# Altium PCB 06002480宁波2号线二期车载PIS系统_功率放大器音频板2 BHC-A-2030-05_PCB V1.0.PcbDoc (part 4 of 6)
Units mil, origin at the board's own origin, x right, y up, seen from the top; angles counter-clockwise.
Board outline 3385.83 x 3779.53 mil, 4 copper layers (Top Layer, GND, VDD, Bottom Layer); 210 components, 185 nets, 792 pads, 313 vias.
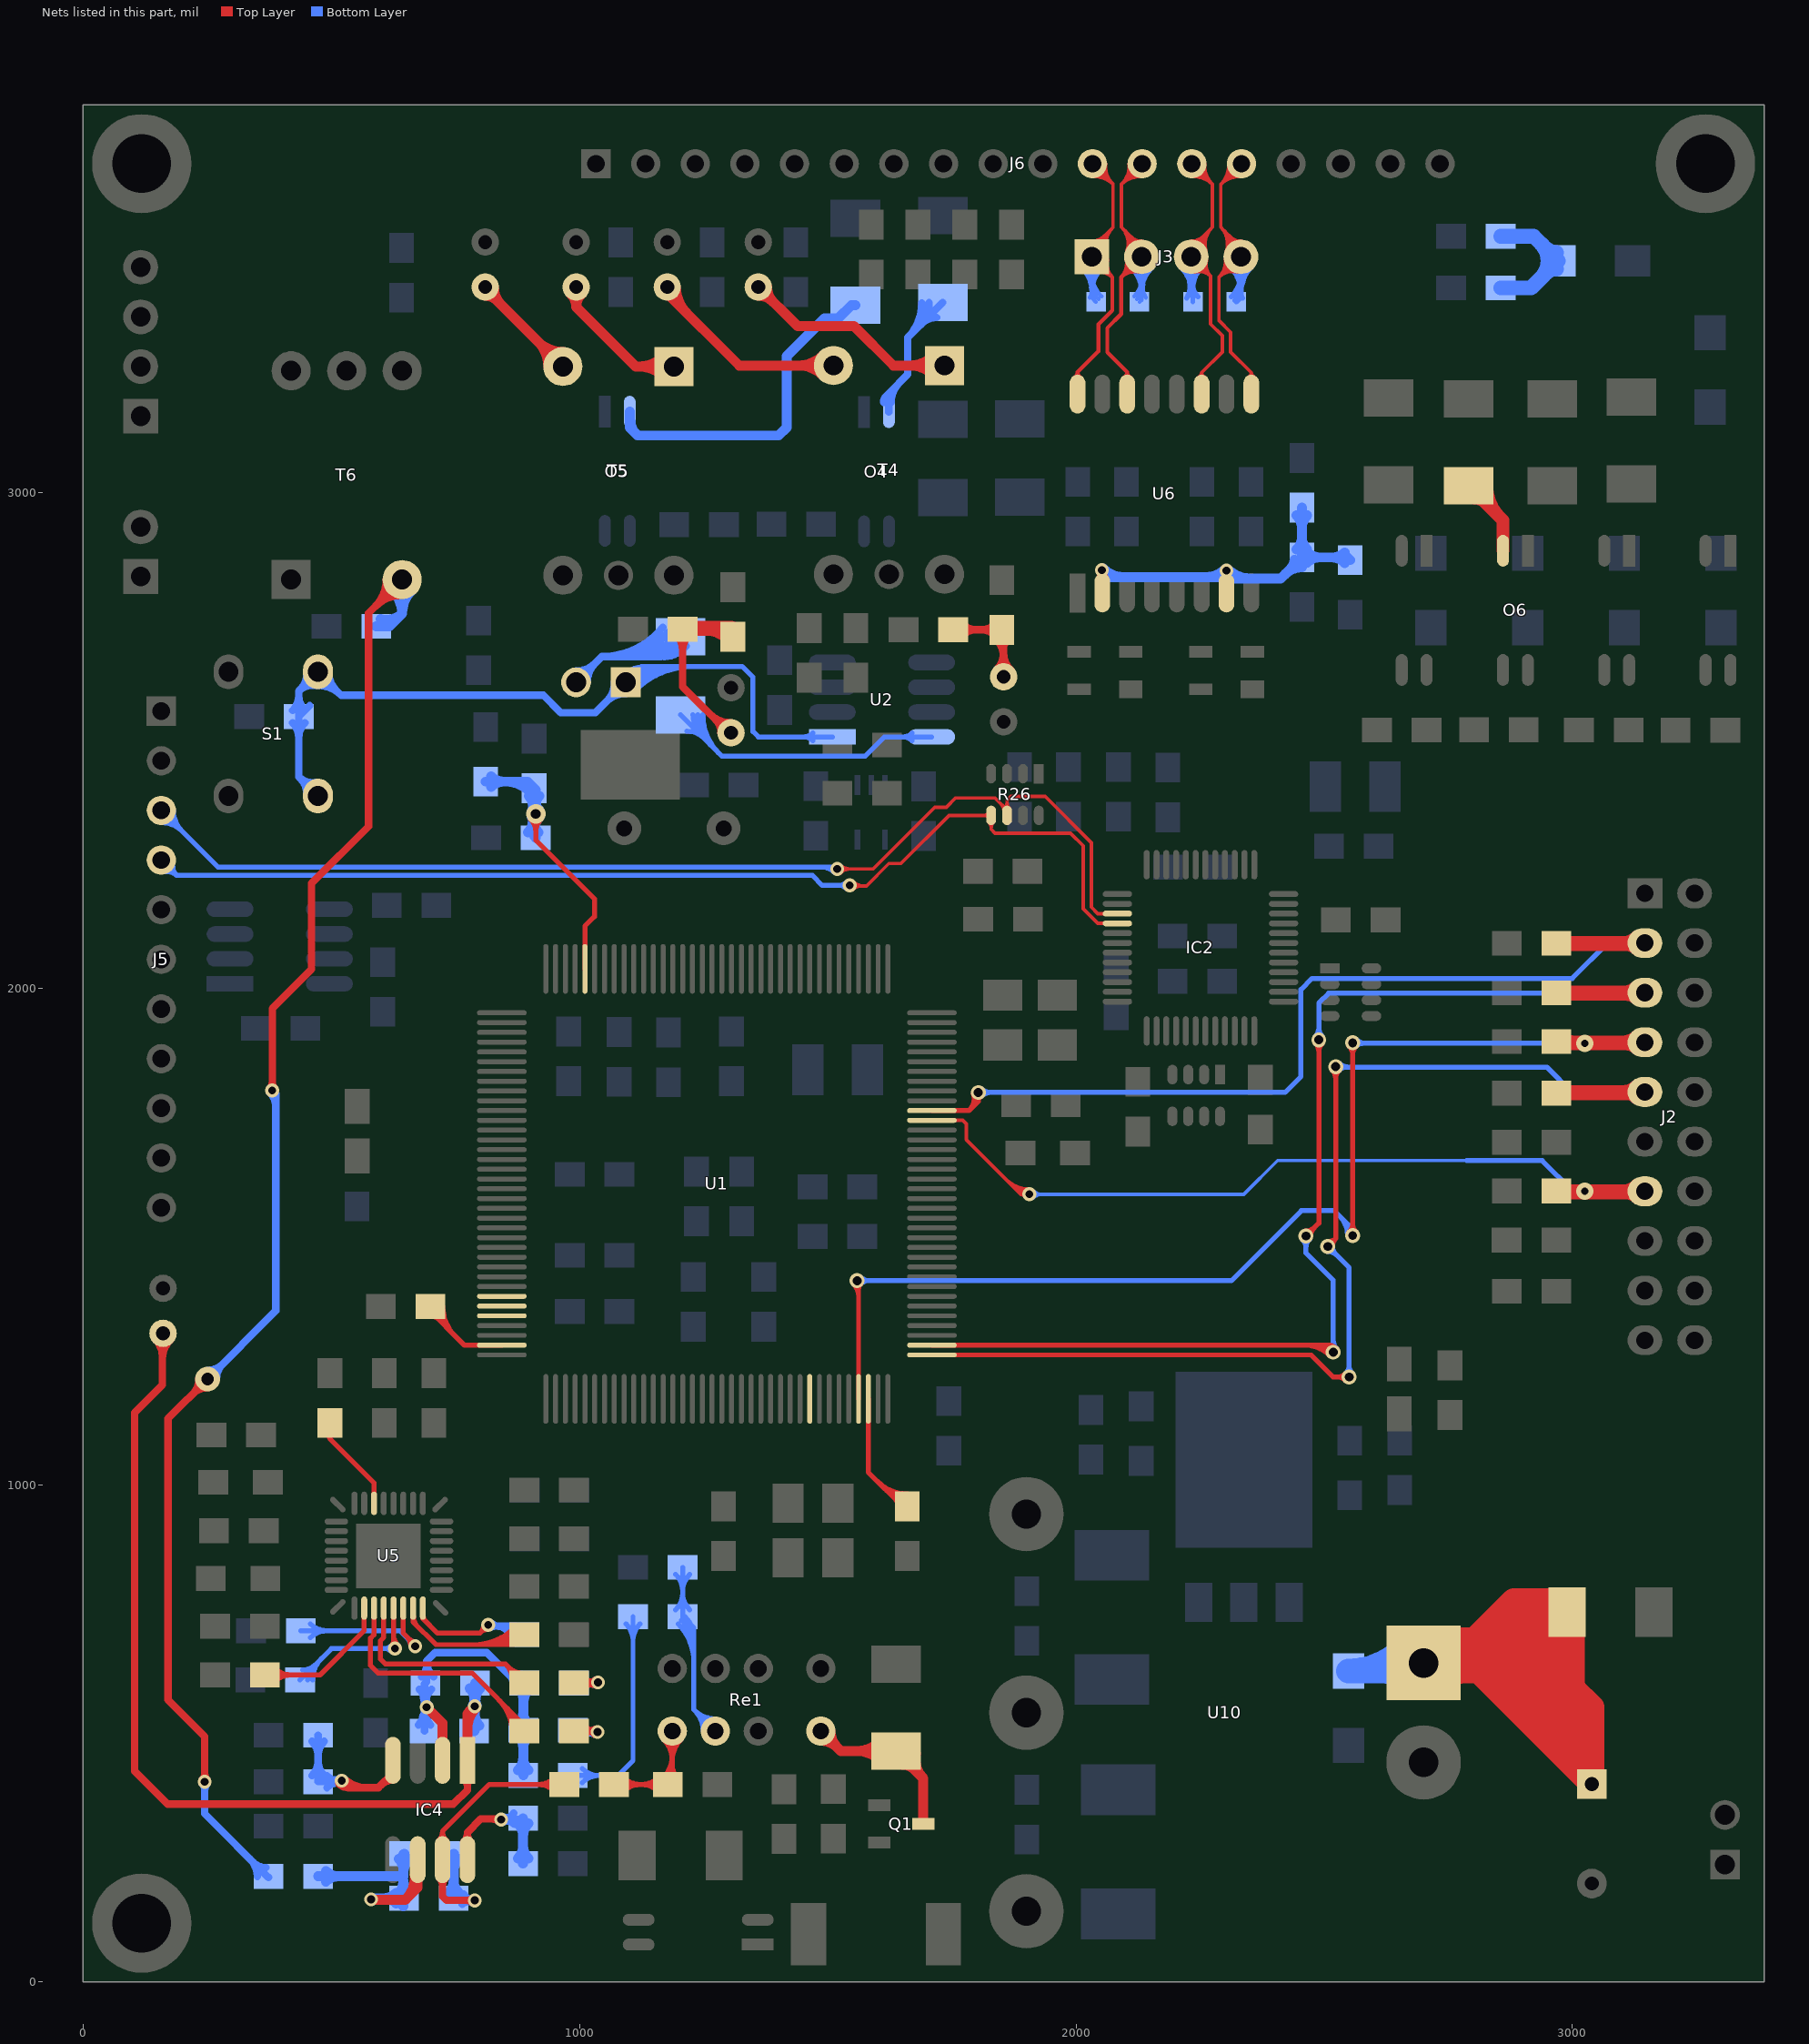
[diagram p6: the nets of this part, all layers, seen from the top]

## Via types
v1: diameter 28, hole 16, Top Layer to Bottom Layer, 240 vias
v2: diameter 30, hole 15, Top Layer to Bottom Layer, 25 vias
v3: diameter 35, hole 15, Top Layer to Bottom Layer, 16 vias
v4: diameter 30, hole 18, Top Layer to Bottom Layer, 10 vias
v5: diameter 40, hole 20, Top Layer to Bottom Layer, 9 vias
v6: diameter 50, hole 25, Top Layer to Bottom Layer, 7 vias
v7: diameter 50, hole 28, Top Layer to Bottom Layer, 5 vias
v8: diameter 36, hole 20, Top Layer to Bottom Layer, 1 vias

## Nets (pads, with @x,y where several pads share a name; then routed paths per layer and width w, separated by ;. In a path a pad name is that pad's centre, name@x,y a point inside that pad or via, vN(x,y) a via of type N, cw(c..) or ccw(c..) an arc to the next point about the centre after c; other vN are vias at no path point) (continued)
JNRST: J2.3 R12.1 U1.134 | length 2219.1
  Top Layer w10: U1.134@1709.58,1754.57 1784.57,1754.57 ; v4@1793.37,1788.29 cw(c1760.19,1778.95) 1784.57,1754.57 ; 1796.64,1766.64 ccw(c1779.03,1784.25) v4(1803,1791) 1803,1773 ; v4@1797.72,1782.51 cw(c1791.8,1773) 1803,1773 ; v4@1808.28,1782.51 ccw(c1814.2,1773) 1803,1773 ; 1784.57,1754.57 1803,1773
  Top Layer w30: R12.1@2967.68,2090.77 J2.3@3144.77,2090.77 ; R12.1@2979.75,2098.44 ccw(c2998.27,2116.96) 2998.27,2090.77 ; 3101.82,2090.77 ccw(c3101.82,2131.18) J2.3@3130.39,2102.61 ; 3107.76,2090.77 cw(c3107.76,2058.76) J2.3@3130.39,2081.39
  Bottom Layer w10: v4(1803,1791) 2421,1791 2453,1823 2453,1998 2475.5,2020.5 2999.5,2020.5 3071,2092 J2.3@3146,2092 ; v4@1810.07,1783.93 cw(c1827.14,1766.86) 1827.14,1791 cw(c1827.14,1815.14) v4@1810.07,1798.07 ; J2.3@3123.32,2074.32 ccw(c3080.64,2031.64) 3080.64,2092 ccw(c3080.64,2152.36) J2.3@3123.32,2109.68 ; J2.3@3130.39,2081.39 ccw(c3104.79,2055.79) 3104.79,2092 ccw(c3104.79,2128.21) J2.3@3130.39,2102.61
JTCK: J2.9 R29.2 U1.109 | length 2765.1
  Top Layer w10: U1.109@1709.58,1262.44 2473.44,1262.44 2517.88,1218 v4(2550,1218) ; v4(2507,1481) 2523,1497 ; v4@2507.47,1490.99 ccw(c2508.43,1511.56) 2523,1497 ; v4@2515.93,1835.93 cw(c2498.86,1818.86) 2523,1818.86 cw(c2547.14,1818.86) v4@2530.07,1835.93 ; v4@2516.99,1481.47 cw(c2537.56,1482.43) 2523,1497 ; v4(2523,1843) 2523,1497 ; v4@2542.93,1210.93 ccw(c2525.86,1193.86) 2525.86,1218 ccw(c2525.86,1242.14) v4@2542.93,1225.07
  Top Layer w30: R29.2@2967.68,1790.77 J2.9@3144.77,1790.77 ; R29.2@2979.75,1782.56 cw(c2999.57,1762.74) 2999.57,1790.77 ; 3101.82,1790.77 ccw(c3101.82,1831.18) J2.9@3130.39,1802.61 ; 3107.76,1790.77 cw(c3107.76,1758.76) J2.9@3130.39,1781.39
  Bottom Layer w10: v4@2507,1471 cw(c2507,1446.86) 2524.07,1463.93 cw(c2541.14,1481) v4@2517,1481 ; v4(2507,1481) 2550,1438 v4(2550,1218) ; v4(2523,1843) 2524,1842 2948.26,1842 3001,1789.26 3143.26,1789.26 J2.9@3146,1792 ; v4@2530.07,1835.93 cw(c2544.73,1821.27) 2544.73,1842 ; v4@2530.07,1850.07 ccw(c2549.56,1869.56) 2549.56,1842 ; v4@2542.93,1225.07 ccw(c2525.86,1242.14) 2550,1242.14 ccw(c2574.14,1242.14) v4@2557.07,1225.07 ; 3074.03,1789.26 ccw(c3074.03,1858.97) J2.9@3123.32,1809.68 ; 3087.26,1789.26 cw(c3087.26,1738.26) J2.9@3123.32,1774.32 ; 3098.17,1789.26 ccw(c3098.17,1834.83) J2.9@3130.39,1802.61
JTDI: J2.5 R13.2 U1.110 | length 2954.5
  Top Layer w10: U1.110@1709.58,1282.13 2503.87,1282.13 ; 2459.75,1282.13 cw(c2459.75,1209.75) v4@2510.93,1260.93 ; v4(2463,1502) 2489,1528 v4(2489,1897) ; v4@2463,1512 ccw(c2463,1536.14) 2480.07,1519.07 ccw(c2497.14,1502) v4@2473,1502 ; v4@2481.93,1889.93 cw(c2464.86,1872.86) 2489,1872.86 cw(c2513.14,1872.86) v4@2496.07,1889.93 ; 2483.9,1282.13 cw(c2483.9,1233.9) v4(2518,1268) 2503.87,1282.13 ; 2508.04,1282.13 cw(c2508.04,1258.04) v4@2525.07,1275.07 ; v4@2508.1,1269.42 ccw(c2493.3,1271.55) 2503.87,1282.13 ; v4@2516.58,1277.9 cw(c2514.45,1292.7) 2503.87,1282.13
  Top Layer w30: R13.2@2967.68,1990.77 J2.5@3144.77,1990.77 ; R13.2@2979.75,1998.7 ccw(c2998.9,2017.85) 2998.9,1990.77 ; 3101.82,1990.77 ccw(c3101.82,2031.18) J2.5@3130.39,2002.61 ; 3107.76,1990.77 cw(c3107.76,1958.76) J2.5@3130.39,1981.39
  Bottom Layer w10: v4@2455.93,1494.93 cw(c2438.86,1477.86) 2463,1477.86 cw(c2487.14,1477.86) v4@2470.07,1494.93 ; v4(2463,1502) 2463,1468 2518,1413 v4(2518,1268) ; v4@2481.93,1904.07 ccw(c2464.86,1921.14) 2489,1921.14 ccw(c2513.14,1921.14) v4@2496.07,1904.07 ; v4(2489,1897) 2489,1971 2509,1991 3145,1991 J2.5@3146,1992 ; v4@2510.93,1275.07 ccw(c2493.86,1292.14) 2518,1292.14 ccw(c2542.14,1292.14) v4@2525.07,1275.07 ; 3078.23,1991 ccw(c3078.23,2054.77) J2.5@3123.32,2009.68 ; 3083.06,1991 cw(c3083.06,1934.06) J2.5@3123.32,1974.32 ; 3102.37,1991 ccw(c3102.37,2030.63) J2.5@3130.39,2002.61 ; 3107.2,1991 cw(c3107.2,1958.2) J2.5@3130.39,1981.39
JTDO: J2.13 R15.1 U1.133 | length 1914.4
  Top Layer w7: U1.133@1709.58,1734.88 1772,1734.88 1779,1727.88 1779,1696 1889,1586 ; 1859.05,1615.95 ccw(c1906,1662.89) v1@1906,1596.5 ; 1871,1604 ccw(c1906,1638.99) v1@1906,1589.5 ; 1882.95,1592.05 ccw(c1906,1615.09) v1@1906,1582.5 ; v1@1896.61,1581.3 ccw(c1889,1577.49) 1889,1586 ; v1@1896.61,1590.7 cw(c1889,1594.51) 1889,1586 ; v1(1906,1586) 1889,1586
  Top Layer w30: R15.1@2967.68,1590.77 J2.13@3144.77,1590.77 ; R15.1@2979.75,1599.44 ccw(c3000.68,1620.37) 3000.68,1590.77 ; 3101.82,1590.77 ccw(c3101.82,1631.18) J2.13@3130.39,1602.61 ; 3107.76,1590.77 cw(c3107.76,1558.76) J2.13@3130.39,1581.39
  Bottom Layer w7: v1(1906,1586) 2338,1586 2406,1654 2787,1654 ; v1@1913.42,1578.58 cw(c1931.35,1560.65) 1931.35,1586 cw(c1931.35,1611.35) v1@1913.42,1593.42
  Bottom Layer w10: 2787,1654 2939,1654 3001,1592 ; v3@3014.76,1584.83 ccw(c3001,1575.21) 3001,1592 ; v3@3014.76,1599.17 cw(c3001,1608.79) 3001,1592 ; v3(3025,1592) 3001,1592
JTMS: J2.7 R14.1 U1.105 | length 2745.7
  Top Layer w10: v4@1551.93,1404.93 cw(c1527.75,1380.75) 1561.94,1380.75 ; v4(1559,1412) 1561.94,1409.06 U1.105@1561.94,1173.86 ; 1561.94,1394.97 cw(c1576.03,1394.97) v4@1566.07,1404.93 ; v4@2549.93,1510.07 ccw(c2532.86,1527.14) 2557,1527.14 ccw(c2581.14,1527.14) v4@2564.07,1510.07 ; v4@2549.93,1883.93 cw(c2532.86,1866.86) 2557,1866.86 cw(c2581.14,1866.86) v4@2564.07,1883.93 ; v4(2557,1503) v4(2557,1891)
  Top Layer w30: R14.1@2967.68,1890.77 J2.7@3144.77,1890.77 ; R14.1@2979.75,1900.44 ccw(c3003.1,1923.79) 3003.1,1890.77 ; 3101.82,1890.77 ccw(c3101.82,1931.18) J2.7@3130.39,1902.61 ; 3107.76,1890.77 cw(c3107.76,1858.76) J2.7@3130.39,1881.39
  Bottom Layer w10: v4(1559,1412) 2313,1412 2454,1553 2520,1553 2557,1516 v4(2557,1503) ccw(c2525.62,1503) 2547.81,1525.19 ; v4@1566.07,1404.93 cw(c1583.14,1387.86) 1583.14,1412 cw(c1583.14,1436.14) v4@1566.07,1419.07 ; 2530.74,1542.26 cw(c2491.47,1503) v4@2547,1503 ; v4(2557,1891) 2558,1890 v3(3025,1890) ; v4@2564.07,1883.93 cw(c2578.73,1869.27) 2578.73,1890 ; v4@2564.07,1898.07 ccw(c2583.56,1917.56) 2583.56,1890 ; v3@3016.16,1881.16 ccw(c2994.82,1859.82) 2994.82,1890 ccw(c2994.82,1920.18) v3@3016.16,1898.84
L3CLK: U1.67
L3DATA: U1.66
L3MODE: U1.68
LEDLINK: IC2.28 J5.4 R26.5 | length 2365.3
  Top Layer w7: v1(1544,2208) 1545,2207 1578,2207 1623,2252 1647,2252 1744,2349 R26.5@1829,2349 1829,2321 1837,2313 1989,2313 2014.2,2287.8 2014.2,2161.2 2043.92,2131.48 IC2.28@2083.36,2131.48 ; v1@1551.42,2200.58 cw(c1566.94,2185.07) 1566.94,2207 ; v1@1551.42,2215.42 ccw(c1571.76,2235.76) 1571.76,2207 ; R26.5@1824.4,2334.72 cw(c1813.31,2323.62) 1829,2323.62 cw(c1844.69,2323.62) R26.5@1833.6,2334.72 ; R26.5@1824.4,2344.4 ccw(c1813.31,2333.31) 1813.31,2349 ccw(c1813.31,2364.69) R26.5@1824.4,2353.6
  Bottom Layer w10: J5.4@157.48,2259.06 188.54,2228 ; J5.4@163.15,2235.19 cw(c169.41,2208.87) 188.53,2228 ; J5.4@181.34,2253.38 ccw(c207.66,2247.13) 188.53,2228 ; v1@1537.64,2201.64 ccw(c1522.27,2186.27) 1522.27,2208 ccw(c1522.27,2229.73) v1@1537.64,2214.36 ; v1(1544,2208) 1489,2208 1469,2228 188.54,2228
LEDSPEED: IC2.27 J5.3 R26.6 | length 2516
  Top Layer w7: v1(1519,2241) 1591,2241 1715.5,2365.5 1738.5,2365.5 1757,2384 1837,2384 R26.6@1861,2360 ; v1@1526.42,2233.58 cw(c1544.35,2215.65) 1544.35,2241 cw(c1544.35,2266.35) v1@1526.42,2248.42 ; 1848.97,2372.03 cw(c1835.63,2358.68) R26.6@1854.5,2358.68 ; 1852.15,2368.85 ccw(c1861,2377.7) R26.6@1861,2365.18 ; R26.6@1856.4,2363.28 ccw(c1845.31,2374.38) 1861,2374.38 ccw(c1876.69,2374.38) R26.6@1865.6,2363.28 ; R26.6@1861,2349 R26.6@1861,2360 ; IC2.27@2083.36,2151.17 2044.04,2151.17 2031.1,2164.1 2031.1,2293.9 1938,2387 1869,2387 1861,2379 R26.6@1861,2360
  Bottom Layer w10: J5.3@157.48,2334.53 cw(c157.48,2275.31) 199.35,2317.18 cw(c241.22,2359.06) J5.3@182.01,2359.06 ; J5.3@157.48,2344.53 cw(c157.48,2309.46) 182.28,2334.26 cw(c207.08,2359.06) J5.3@172.01,2359.06 ; J5.3@157.48,2359.06 271.54,2245 1515,2245 v1(1519,2241) ; 1487.62,2245 cw(c1487.62,2209.62) v1@1512.64,2234.64
LINE_OUT: C55.2 U5.12 | length 506.9
  Top Layer w10: U5.12@605.63,752.63 605.63,693.63 599,687 599,650 609,640 850.79,640 ; 858.07,632.72 ccw(c883.68,658.32) C55.2@883.68,622.11 ; C55.2@863.76,603.99 ccw(c818.99,608.2) 850.79,640 ; C55.2@865.83,624.96 cw(c846.47,605.61) C55.2@873.72,603.05 ; C55.2@888.68,602.11 850.79,640
MB_RX_N: D8.A J3.4 J6.14 U6.9 | length 1773.4
  Top Layer w7: 2296.85,3441.85 cw(c2319.01,3419.69) J3.4@2326.3,3450.17 ; 2298.13,3443.13 ccw(c2274.43,3466.83) J3.4@2307.69,3470.97 ; J3.4@2300.74,3470.11 cw(c2256.42,3464.58) 2288,3433 ; 2305.7,3450.7 cw(c2322.43,3433.97) J3.4@2327.93,3456.98 ; J6.14@2307.08,3660.13 cw(c2253.99,3657.5) 2291.57,3619.91 ; 2307.13,3517.87 cw(c2281.56,3492.3) 2315.55,3479.97 ccw(c2281.56,3492.3) 2307.13,3517.87 ; J6.14@2314.07,3660.47 cw(c2275.26,3658.55) 2302.73,3631.08 cw(c2330.21,3603.6) J6.14@2332.13,3642.41 ; J3.4@2324.68,3443.36 ccw(c2315.6,3405.4) 2288,3433 ; J6.14@2331.78,3635.42 ccw(c2329.16,3582.33) 2291.57,3619.91 ; J3.4@2332,3474 2329,3474 2288,3433 ; J6.14@2333.07,3661.41 2291.57,3619.91 ; U6.9@2347.58,3232.09 ccw(c2343.29,3240.79) 2353,3240.79 ; U6.9@2353,3197.48 2353,3240.8 ; U6.9@2358.42,3232.09 cw(c2362.71,3240.79) 2353,3240.79 ; 2288,3433 2288,3345.54 2311.5,3322.04 2311.5,3282.3 2353,3240.8 ; 2291.57,3533.42 cw(c2258.73,3500.59) 2302.39,3484.74 ccw(c2258.73,3500.59) 2291.57,3533.43 ; 2291.57,3533.43 2291.57,3619.91 ; 2291.57,3533.42 2333,3492 2291.57,3533.43 ; 2299.35,3525.65 cw(c2270.15,3496.44) 2308.97,3482.36 ccw(c2270.15,3496.45) 2299.35,3525.65 ; 2310.65,3514.34 ccw(c2332,3535.69) 2332,3505.5 cw(c2332,3535.68) 2310.66,3514.34 ; 2314.91,3510.09 cw(c2292.98,3488.16) 2322.13,3477.58 ccw(c2292.97,3488.16) 2314.91,3510.09
  Bottom Layer w10: J3.4@2310.79,3452.79 cw(c2259.57,3401.57) 2332,3401.57 cw(c2404.43,3401.57) J3.4@2353.21,3452.79 ; D8.A@2312.62,3393.38 ccw(c2265.82,3440.18) J3.4@2332,3440.18 ; D8.A@2315.09,3395.37 ccw(c2287.16,3439.05) 2337.79,3427.91 ; J3.4@2317.86,3459.86 cw(c2283.72,3425.72) 2332,3425.72 cw(c2380.28,3425.72) J3.4@2346.14,3459.86 ; D8.A@2319.69,3386.31 ccw(c2289.96,3416.04) 2332,3416.04 ; D8.A@2320.48,3386.95 ccw(c2305.55,3410.28) 2332.61,3404.34 ; D8.A@2323,3383 2332,3392 J3.4@2332,3474 ; 2332.81,3405.27 ccw(c2351.43,3401.18) D8.A@2335.37,3390.91
MB_RX_P: D8.K J3.3 J6.13 U6.11 | length 1681.4
  Top Layer w7: J3.3@2232,3474 2271,3435 ; J6.13@2233.07,3661.41 2274.57,3619.91 2274.57,3533.57 2233,3492 2274.57,3533.57 ; J6.13@2234.01,3642.41 cw(c2235.93,3603.6) 2263.41,3631.08 cw(c2290.88,3658.55) J6.13@2252.08,3660.47 ; J6.13@2234.36,3635.42 cw(c2236.99,3582.33) 2274.57,3619.91 cw(c2312.15,3657.5) J6.13@2259.07,3660.13 ; J3.3@2238.12,3450.28 cw(c2244.44,3425.78) 2262.33,3443.67 cw(c2280.22,3461.56) J3.3@2255.72,3467.88 ; J3.3@2239.87,3443.5 cw(c2247.99,3412) 2271,3435 ; U6.11@2247.58,3232.09 ccw(c2243.29,3240.79) 2253,3240.79 ; U6.11@2253,3197.48 2253,3240.8 ; U6.11@2258.42,3232.09 cw(c2262.71,3240.79) 2253,3240.79 ; J3.3@2262.5,3466.13 ccw(c2294,3458.01) 2271,3435 ; 2253,3240.8 2294.5,3282.3 2294.5,3315 2271,3338.5 2271,3435 ; J3.3@2232,3505.5 ccw(c2232,3540.52) 2256.76,3515.76 cw(c2232,3540.51) J3.3@2232,3505.5 ; J3.3@2242.03,3477.1 cw(c2272.39,3486.46) 2249.93,3508.92 ccw(c2272.39,3486.46) J3.3@2242.03,3477.1 ; J3.3@2248.72,3479.16 cw(c2284.94,3490.33) 2258.14,3517.14 ccw(c2284.95,3490.34) J3.3@2248.72,3479.16 ; J3.3@2255.41,3481.22 cw(c2297.5,3494.21) 2266.35,3525.35 ccw(c2297.5,3494.21) J3.3@2255.41,3481.22 ; J3.3@2262.1,3483.29 cw(c2310.06,3498.08) 2274.57,3533.56 ccw(c2310.06,3498.08) J3.3@2262.1,3483.29
  Bottom Layer w10: J3.3@2210.79,3452.79 cw(c2151.84,3393.84) D8.K@2235.2,3393.84 ; J3.3@2217.86,3459.86 cw(c2175.98,3417.98) 2235.2,3417.98 ; D8.K@2222.69,3390.68 ccw(c2185.11,3413.72) 2227.98,3424 ; D8.K@2224.82,3393.38 ccw(c2199.75,3418.45) 2235.2,3418.45 ccw(c2270.66,3418.45) D8.K@2245.59,3393.38 ; 2230.82,3412.13 ccw(c2256.91,3418.39) D8.K@2242.88,3395.52 ; J3.3@2232,3474 2235.2,3470.8 D8.K@2235.2,3383 ; 2235.2,3409.31 cw(c2296.69,3409.31) J3.3@2253.21,3452.79 ; 2235.2,3433.45 cw(c2272.55,3433.45) J3.3@2246.14,3459.86
MB_TX_N: D6.A J3.2 J6.12 U6.14 | length 1834.9
  Top Layer w7: J6.12@2107.08,3660.13 cw(c2053.99,3657.5) 2091.57,3619.91 ; 2107.13,3517.87 cw(c2081.56,3492.3) 2115.55,3479.97 ccw(c2081.56,3492.3) 2107.13,3517.87 ; J6.12@2114.07,3660.47 cw(c2075.26,3658.55) 2102.73,3631.08 cw(c2130.21,3603.6) J6.12@2132.13,3642.41 ; J6.12@2131.78,3635.42 ccw(c2129.16,3582.33) 2091.57,3619.91 ; J6.12@2133.07,3661.41 2091.57,3619.91 ; 2091.57,3533.42 cw(c2058.73,3500.59) 2102.39,3484.74 ccw(c2058.73,3500.59) 2091.57,3533.43 ; 2091.57,3533.42 2133,3492 2091.57,3533.43 ; 2091.57,3533.43 2091.57,3619.91 ; 2099.35,3525.65 cw(c2070.15,3496.44) 2108.97,3482.36 ccw(c2070.15,3496.45) 2099.35,3525.65 ; 2110.65,3514.34 ccw(c2132,3535.69) 2132,3505.5 cw(c2132,3535.68) 2110.66,3514.34 ; 2114.91,3510.09 cw(c2092.98,3488.16) 2122.13,3477.58 ccw(c2092.97,3488.16) 2114.91,3510.09
  Top Layer w8: U6.14@2096.98,3231.19 ccw(c2090.65,3241.79) 2103,3241.79 ; J3.2@2101.6,3467.94 cw(c2063.62,3460.38) 2091,3433 ; U6.14@2103,3197.48 2103,3241.8 ; U6.14@2109.02,3231.19 cw(c2115.35,3241.79) 2103,3241.79 ; J3.2@2109.44,3469.51 cw(c2081.27,3463.9) 2101.58,3443.58 cw(c2121.9,3423.27) J3.2@2127.51,3451.44 ; J3.2@2125.94,3443.6 ccw(c2118.38,3405.62) 2091,3433 ; J3.2@2132,3474 2091,3433 ; 2091,3433 2091,3358.54 2063,3330.54 2063,3281.8 2103,3241.8
  Bottom Layer w8: J3.2@2110.08,3452.08 cw(c2057.16,3399.16) 2132,3399.16 cw(c2206.84,3399.16) J3.2@2153.92,3452.08 ; J3.2@2115.74,3457.74 cw(c2076.47,3418.47) 2132,3418.47 cw(c2187.53,3418.47) J3.2@2148.26,3457.74 ; D6.A@2116.91,3394.09 ccw(c2080.48,3430.52) 2132,3430.52 ; D6.A@2119.14,3395.94 ccw(c2095.89,3429.89) 2136.33,3422.32 ; J3.2@2121.39,3463.39 cw(c2095.79,3437.79) 2132,3437.79 cw(c2168.21,3437.79) J3.2@2142.61,3463.39 ; D6.A@2122.57,3388.43 ccw(c2099.79,3411.21) 2132,3411.21 ccw(c2156.21,3411.21) D6.A@2139.09,3394.09 ; D6.A@2123.66,3389.34 ccw(c2111.32,3407.35) 2132.78,3403.34 ; D6.A@2123.65,3398.07 ccw(c2121.07,3407.01) 2130.21,3408.72 ; D6.A@2128,3383 2132,3387 J3.2@2132,3474 ; 2130.89,3405.11 ccw(c2144.94,3407.74) D6.A@2136.86,3395.94 ; 2135.48,3417.77 ccw(c2169.48,3411.41) D6.A@2140.94,3391.86
MB_TX_P: D6.K J3.1 J6.11 U6.16 | length 1825.1
  Top Layer w7: J6.11@2033.07,3661.41 2074.57,3619.91 2074.57,3533.57 2033,3492 2074.57,3533.57 ; J6.11@2034.01,3642.41 cw(c2035.93,3603.6) 2063.41,3631.08 cw(c2090.88,3658.55) J6.11@2052.08,3660.47 ; J6.11@2034.36,3635.42 cw(c2036.99,3582.33) 2074.57,3619.91 cw(c2112.15,3657.5) J6.11@2059.07,3660.13 ; J3.1@2032,3505.5 ccw(c2032,3540.52) 2056.76,3515.76 cw(c2032,3540.51) J3.1@2032,3505.5 ; J3.1@2042.03,3477.1 cw(c2072.39,3486.46) 2049.93,3508.92 ccw(c2072.39,3486.46) J3.1@2042.03,3477.1 ; J3.1@2048.72,3479.16 cw(c2084.94,3490.33) 2058.14,3517.14 ccw(c2084.95,3490.34) J3.1@2048.72,3479.16 ; J3.1@2055.41,3481.22 cw(c2097.5,3494.21) 2066.35,3525.35 ccw(c2097.5,3494.21) J3.1@2055.41,3481.22 ; J3.1@2062.1,3483.29 cw(c2110.06,3498.08) 2074.57,3533.56 ccw(c2110.06,3498.08) J3.1@2062.1,3483.29
  Top Layer w8: U6.16@1996.98,3231.19 ccw(c1990.65,3241.79) 2003,3241.79 ; U6.16@2003,3197.48 2003,3241.8 ; U6.16@2009.02,3231.19 cw(c2015.35,3241.79) 2003,3241.79 ; J3.1@2032,3474 2073,3433 ; J3.1@2036.49,3451.44 cw(c2042.1,3423.27) 2062.42,3443.58 cw(c2082.73,3463.9) J3.1@2054.56,3469.51 ; J3.1@2038.06,3443.6 cw(c2045.62,3405.62) 2073,3433 ; J3.1@2062.4,3467.94 ccw(c2100.38,3460.38) 2073,3433 ; 2003,3241.8 2045,3283.8 2045,3338 2073,3366 2073,3433
  Bottom Layer w8: J3.1@2010.08,3452.08 cw(c1957.16,3399.16) 2032,3399.16 cw(c2106.84,3399.16) J3.1@2053.92,3452.08 ; J3.1@2015.74,3457.74 cw(c1976.47,3418.47) 2032,3418.47 cw(c2087.53,3418.47) J3.1@2048.26,3457.74 ; J3.1@2021.39,3463.39 cw(c1995.79,3437.79) 2032,3437.79 cw(c2068.21,3437.79) J3.1@2042.61,3463.39 ; D6.K@2027.26,3391.86 ccw(c2010.36,3403.43) 2030.5,3407.2 ; D6.K@2029.11,3394.09 ccw(c2022.14,3401.06) D6.K@2032,3401.06 ; 2029.53,3412.38 ccw(c2064.85,3418.99) D6.K@2044.55,3389.34 ; D6.K@2032,3402.04 ccw(c2059.25,3402.04) D6.K@2039.98,3382.78 ; 2032,3421.36 ccw(c2078.56,3421.36) D6.K@2045.64,3388.43 ; J3.1@2032,3440.67 ccw(c2097.88,3440.67) D6.K@2051.29,3394.09 ; J3.1@2032,3474 2032,3391.2 D6.K@2040.2,3383
MCO1: U1.100
NetC2_2: C2.2 T4.2 | length 577.5
  Top Layer w20: C2.2@1176.67,3413 1176.67,3399.85 1321.52,3255 T4.2@1511.38,3255 ; C2.2@1194.23,3413 ccw(c1268.37,3413) 1215.94,3360.57 ; T4.2@1490.61,3234.23 ccw(c1440.47,3184.09) 1440.47,3255 ccw(c1440.47,3325.91) T4.2@1490.61,3275.77
NetC3_2: C3.2 C10.2 R5.2 | length 477.8
  Top Layer w15: C3.2@1752.64,2722.95 1850.35,2722.95 R5.2@1850.63,2722.68 1854,2719.31 C10.2@1854,2619.55 ; C3.2@1770.01,2710.58 cw(c1799.89,2680.7) 1799.89,2722.95 cw(c1799.89,2765.2) C3.2@1770.01,2735.33 ; 1807.71,2722.95 cw(c1807.71,2679.76) R5.2@1838.26,2710.3 ; 1809.05,2722.95 ccw(c1809.05,2764.26) R5.2@1838.26,2735.05 ; R5.2@1838.26,2705.3 cw(c1800.25,2667.29) 1854,2667.29 ; C10.2@1839.82,2642.18 ccw(c1805.57,2676.43) 1854,2676.43 ccw(c1902.43,2676.43) C10.2@1868.18,2642.18 ; 1854,2683.56 cw(c1884.74,2683.56) R5.2@1863,2705.3
NetC5_1: C5.1 U5.30 | length 219.1
  Top Layer w10: C5.1@491.4,1101.45 cw(c489.17,1093.9) 497.05,1093.9 ; C5.1@497.05,1125.64 497.05,1093.9 ; C5.1@502.7,1101.45 ccw(c504.92,1093.9) 497.05,1093.9 ; U5.30@585.94,963.57 585.94,1005 497.05,1093.9
NetC6_2: C6.2 T4.1 | length 618.4
  Top Layer w20: C6.2@1360,3395.44 cw(c1360,3353.05) 1389.98,3383.02 cw(c1419.95,3413) C6.2@1377.56,3413 ; C6.2@1360,3413 1439,3334 1553,3334 1632,3255 T4.1@1735,3255 ; T4.1@1714.23,3234.23 ccw(c1664.09,3184.09) 1664.09,3255 ccw(c1664.09,3325.91) T4.1@1714.23,3275.77
NetC12_2: C12.2 T5.2 | length 402.7
  Top Layer w20: C12.2@810,3395.44 cw(c810,3361.79) 833.79,3385.59 ; C12.2@810,3413 810,3409.38 T5.2@966.38,3253 ; C12.2@827.56,3413 ccw(c878.69,3413) 842.54,3376.84 ; T5.2@937.01,3253 ccw(c866.1,3253) 916.24,3303.14 ccw(c966.38,3353.28) T5.2@966.38,3282.37
NetC13_2: C13.2 C19.2 R23.2 | length 563.3
  Top Layer w15: C13.2@1195.26,2711.58 cw(c1165.39,2681.7) 1207.64,2681.7 cw(c1249.89,2681.7) C13.2@1220.01,2711.58 ; C13.2@1207.64,2723.95 1207.64,2608 C19.2@1300.64,2515 ; 1262.55,2553.09 ccw(c1305,2595.55) C19.2@1305,2535.51 ; 1274.16,2541.48 cw(c1248.13,2515.45) C19.2@1284.94,2515.45
  Top Layer w30: C13.2@1207.64,2723.95 1209.36,2725.68 R23.2@1305.63,2725.68 ; C13.2@1219.71,2716.88 cw(c1240.94,2695.65) 1240.94,2725.68 ; 1255.52,2725.68 cw(c1255.52,2660.56) R23.2@1301.56,2706.61
NetC14_2: C14.2 T5.1 | length 459.6
  Top Layer w20: C14.2@981.37,3400.15 cw(c955.8,3372.67) 993.33,3372.67 ; C14.2@993.33,3413 993.33,3372.67 ; C14.2@1005.3,3400.15 ccw(c1030.87,3372.67) 993.33,3372.67 ; T5.1@1169.23,3232.23 ccw(c1119.09,3182.09) 1119.09,3253 ccw(c1119.09,3323.91) T5.1@1169.23,3273.77 ; T5.1@1190,3253 1113,3253 993.33,3372.67
NetC21_1: C21.1 JP1.1 S1.2 U2.1 | length 2565.7
  Bottom Layer w10: JP1.1@1082.39,2627.61 cw(c1134.04,2575.96) 1134.04,2649 ; JP1.1@1089.46,2620.54 cw(c1158.18,2551.82) 1158.18,2649 ; JP1.1@1093,2617 1125,2649 ; JP1.1@1096.54,2613.46 cw(c1182.33,2527.67) 1182.33,2649 ; JP1.1@1098.55,2641.38 ccw(c1104.88,2669.12) 1125,2649 ; JP1.1@1103.61,2606.39 cw(c1206.47,2503.53) 1206.47,2649 ; JP1.1@1110.68,2599.32 cw(c1230.61,2479.39) 1230.61,2649 ; JP1.1@1117.38,2622.55 cw(c1145.12,2628.88) 1125,2649 ; U2.1@1469.9,2499.4 ccw(c1451.56,2481.05) 1451.56,2507 ccw(c1451.56,2532.95) U2.1@1469.9,2514.6 ; U2.1@1509,2507 1360,2507 1349,2518 1349,2627.5 1327.5,2649 1125,2649
  Bottom Layer w15: C21.1@421.99,2535.58 cw(c392.11,2505.7) 434.36,2505.7 cw(c476.61,2505.7) C21.1@446.74,2535.58 ; C21.1@421.99,2560.33 ccw(c392.11,2590.2) 434.36,2590.2 ccw(c476.61,2590.2) C21.1@446.74,2560.33 ; 438.13,2422.87 cw(c408.25,2393) S1.2@450.5,2393 ; 438.13,2603.13 ccw(c408.25,2633) S1.2@450.5,2633 ; C21.1@456.41,2570 C21.1@434.36,2547.95 ; S1.2@469.48,2415.22 cw(c463.12,2455.4) 434.36,2426.64 ; S1.2@469.48,2610.78 ccw(c463.12,2570.6) 434.36,2599.36 ; S1.2@473,2388 434.36,2426.64 ; S1.2@473,2610.5 cw(c473,2544.11) 519.95,2591.05 ; S1.2@495.5,2633 ccw(c537.75,2633) 507.87,2603.13 ; JP1.1@1070.5,2617 cw(c1016.18,2617) 1054.59,2578.59 cw(c1093,2540.18) JP1.1@1093,2594.5 ; JP1.1@1093,2617 1032,2556 962,2556 927,2591 520,2591 S1.2@473,2638 434.36,2599.36 ; 434.36,2426.64 C21.1@434.36,2547.95 ; C21.1@434.36,2547.95 434.36,2599.36
NetC30_1: C30.1 C31.2 R48.2 U6.2 U6.7 | length 1229.8
  Top Layer w20: v1(2052,2843) 2052,2846 2053,2845 U6.2@2053,2797 ; v1@2052,2836.91 ccw(c2069.29,2836.91) 2057.06,2824.69 cw(c2069.29,2836.91) v1@2052,2836.91
  Bottom Layer w20: v1(2052,2843) 2066,2829 2288,2829 2302,2843 v1(2303,2842) 2319,2826 2412.31,2826 2428.31,2842 ; v1@2054.83,2845.83 ccw(c2095.46,2886.46) 2095.46,2829 ; 2261.96,2829 ccw(c2261.96,2883.04) v1@2300.17,2844.83 ; v1@2305.83,2844.83 ccw(c2351.28,2890.28) 2351.28,2826 ; 2420.81,2834.5 cw(c2454.95,2800.35) C31.2@2454.95,2848.64 ; C31.2@2444.35,2884.25 ccw(c2418.74,2909.85) 2454.95,2909.85 ccw(c2491.17,2909.85) C31.2@2465.56,2884.25 ; R48.2@2444.35,2953.07 cw(c2418.74,2927.46) 2454.95,2927.46 cw(c2491.17,2927.46) R48.2@2465.56,2953.07 ; R48.2@2454.95,2968.68 C31.2@2454.95,2868.64 ; C31.2@2465.56,2858.03 cw(c2491.17,2832.43) 2491.17,2868.64 cw(c2491.17,2904.85) C31.2@2465.56,2879.25 ; 2514.25,2868.64 cw(c2514.25,2830.25) C30.1@2541.39,2857.39 ; 2517.33,2868.64 ccw(c2517.33,2902.67) C30.1@2541.39,2878.61 ; C30.1@2552,2863 2546.36,2868.64 C31.2@2454.95,2868.64 ; 2428.32,2842 cw(c2446.49,2823.83) 2451.83,2848.97 ccw(c2446.49,2823.83) 2428.32,2842 ; 2428.31,2842 C31.2@2454.95,2868.64 ; C31.2@2432.88,2846.57 ccw(c2415.81,2863.64) C31.2@2439.95,2863.64 ; C31.2@2432.88,2846.57 ccw(c2415.81,2863.64) C31.2@2439.95,2863.64 ; C31.2@2432.88,2846.57 ccw(c2415.81,2863.64) C31.2@2439.95,2863.64
NetC33_2: C33.2 R53.2 R54.2 | length 399.9
  Bottom Layer w30: R54.2@2855.32,3411.37 2916.57,3411.37 C33.2@2971.2,3466 2921.83,3515.37 R53.2@2855.32,3515.37 ; 2936.32,3431.12 ccw(c2901.43,3466) 2950.76,3466 ccw(c2901.43,3466) 2936.32,3500.88 ; C33.2@2945.82,3440.62 cw(c2967.26,3419.18) C33.2@2967.26,3449.5 ; C33.2@2945.82,3491.38 ccw(c2967.26,3512.82) C33.2@2967.26,3482.5
NetC36_2: C36.2 U1.106 | length 404.9
  Top Layer w10: U1.106@1581.63,1173.86 1581.63,1026.37 1650.36,957.64 C36.2@1660.05,957.64 ; 1600.83,1007.17 ccw(c1660.05,1066.38) C36.2@1660.05,982.64 ; 1617.91,990.09 ccw(c1660.05,1032.24) C36.2@1660.05,972.64 ; 1634.98,973.02 ccw(c1660.05,998.09) C36.2@1660.05,962.64 ; C36.2@1636.29,971.71 cw(c1627.22,962.64) C36.2@1640.05,962.64
NetC37_2: C37.2 U1.71 | length 331.8
  Top Layer w10: C37.2@699.64,1359.95 699.64,1350.36 767.87,1282.13 U1.71@843.44,1282.13 ; C37.2@704.64,1339.95 cw(c704.64,1326.9) C37.2@713.87,1336.13 ; C37.2@704.64,1359.95 ccw(c739.87,1359.95) C37.2@714.96,1335.04 ; C37.2@714.64,1359.95 ccw(c774.01,1359.95) 732.03,1317.97 ; C37.2@724.64,1359.95 ccw(c808.15,1359.95) 749.1,1300.9
NetC45_1: C45.1 C46.2 R60.2 U1.32 | length 1186.4
  Top Layer w10: v5@901.39,2341.39 cw(c875.79,2315.79) 912,2315.79 cw(c948.21,2315.79) v5@922.61,2341.39 ; v5(912,2352) 912,2299 1030,2181 1030,2145 1010.76,2125.76 U1.32@1010.76,2040
  Bottom Layer w10: v5@911.64,2352 v5(912,2352)
  Bottom Layer w20: C45.1@811,2417 895.05,2417 R60.2@908.37,2403.68 ; C45.1@821.61,2406.39 cw(c847.21,2380.79) 847.21,2417 cw(c847.21,2453.21) C45.1@821.61,2427.61 ; 852.06,2417 cw(c852.06,2352.37) R60.2@897.76,2398.07 ; C46.2@896.03,2314.65 ccw(c866.25,2344.44) v5@908.37,2344.44 ; C46.2@903.29,2325.47 cw(c931.72,2317.85) v5@917,2343.34 ; v5@903.34,2347 cw(c887.01,2337.57) 905.22,2332.7 ; R60.2@904.48,2376.97 ccw(c930.43,2383.93) 917,2360.66 cw(c928.53,2380.63) R60.2@906.26,2374.66 ; v5@904.93,2359.07 ccw(c888.73,2375.27) R60.2@911.64,2375.27 ; 905.48,2373.25 cw(c884.79,2367.71) 903.34,2357 ccw(c881.5,2369.61) R60.2@905.86,2376.14 ; C46.2@908.37,2319.09 cw(c944.91,2319.09) v5@919.07,2344.93 ; v5@908.37,2336.08 ccw(c938.67,2336.08) C46.2@917.25,2314.65 ; R60.2@908.37,2384.91 ccw(c944.91,2384.91) 919.07,2359.07 cw(c937.01,2377.01) R60.2@911.64,2377.01 ; C46.2@911.64,2304.05 908.37,2307.32 R60.2@908.37,2403.68 ; v5@911.64,2352 911.64,2400.41 R60.2@908.37,2403.68 ; v5@911.64,2354.57 ccw(c864.27,2354.57) 897.76,2388.07 cw(c872.16,2362.46) 908.37,2362.46 cw(c944.58,2362.46) 918.98,2388.07 ccw(c936.69,2370.35) v5@911.64,2370.35 ; R60.2@912.71,2374.35 ccw(c925.5,2370.92) v5@917.81,2360.14
NetC54_1: C54.1 IC4.2 R70.2 R71.1 R74.2 R75.1 | length 1275.9
  Top Layer w20: v1(692,553) 724,521 IC4.2@724,446
  Bottom Layer w15: C54.1@675.26,517.42 ccw(c645.39,547.3) 687.64,547.3 ccw(c729.89,547.3) C54.1@700.01,517.42 ; R71.1@676.95,589 cw(c651.14,563.19) v1@687.64,563.19 ; R71.1@681.95,613.74 ccw(c657.69,638.01) 692,638.01 ; 683.59,532.17 cw(c707.77,525.69) v1@695.25,547.37 ; 685.43,571.42 ccw(c705.79,576.88) v1@695.25,558.63 ; C54.1@687.64,505.05 687.64,599.68 R71.1@689.32,601.37 692,604.05 692,646 ; C54.1@687.64,526.78 cw(c718.22,526.78) v1@696.6,548.4 ; v1@687.64,555.05 cw(c735.64,555.05) R71.1@701.7,589 ; R71.1@687.64,579.22 ccw(c718.22,579.22) v1@696.6,557.6 ; 690.75,535.69 cw(c701.01,538.44) v1@695.42,547.47 ; 691.94,571.12 ccw(c704.23,567.83) v1@696.14,558.01 ; R71.1@706.06,614.35 cw(c734.65,646) 692,646 ; 837.92,638.08 ccw(c883.68,683.85) R70.2@883.68,619.13 ; R70.2@860.38,615.62 cw(c846.39,601.63) R70.2@866.18,601.63 ; R70.2@877.37,598.63 813,663 709,663 692,646
  Bottom Layer w20: R75.1@875.72,425.98 ccw(c849.26,452.43) 886.68,452.43 ; R74.2@876.07,496.02 cw(c850.46,470.42) 886.68,470.42 cw(c922.89,470.42) R74.2@897.28,496.02 ; R74.2@876.07,517.24 ccw(c850.46,542.84) 886.68,542.84 ccw(c922.89,542.84) R74.2@897.28,517.24 ; R70.2@877.37,598.63 886.68,598.63 R74.2@886.68,506.63 R75.1@886.68,415.72 ; R70.2@878.07,591.02 cw(c857.29,570.25) 886.68,570.25 ; 886.68,450.73 ccw(c921.69,450.73) R75.1@896.93,425.98 ; 886.68,560.59 cw(c929.72,560.59) R70.2@899.28,591.02
NetC54_2: C54.2 C64.1 IC4.1 R71.2 | length 2225.4
  Top Layer w15: C64.1@146.82,1291.82 cw(c115.43,1260.43) 159.82,1260.43 ; 159.82,1254.72 cw(c212.28,1254.72) C64.1@175.18,1291.82 ; C64.1@161,1306 159.82,1304.82 159.82,1202.18 104,1146.36 104,424 170,358 746,358 774,386 IC4.1@774,446 ; IC4.1@768.17,408.67 cw(c754.09,394.59) 774,394.59 cw(c793.91,394.59) IC4.1@779.83,408.67
  Top Layer w20: IC4.1@774,446 774,540 v1(789,555) ; 774,509.13 cw(c834.87,509.13) v1@791.83,552.17 ; 774,533.79 cw(c791.34,533.79) v1@789.44,551.02
  Bottom Layer w20: C54.2@777.03,515.65 ccw(c747.36,545.33) v1@789.32,545.33 ; R71.2@778.72,590.76 cw(c753.11,565.16) 789.32,565.16 cw(c825.54,565.16) R71.2@799.93,590.76 ; v1@785.54,553 cw(c768.85,543.36) 787.46,538.38 ; v1@785.54,557 ccw(c768.48,566.85) 787.5,571.95 ; C54.2@787.64,505.05 789.32,506.73 R71.2@789.32,601.37 ; 789.32,537.19 ccw(c819.78,537.19) C54.2@798.25,515.65 ; 790.71,570.33 ccw(c807.68,565.78) v1@792.46,557
NetC55_1: C55.1 R70.1 | length 390.8
  Top Layer w10: C55.1@988.68,602.11 v1@1036.11,602.11 ; C55.1@1009.1,589.38 cw(c1036.11,567.1) v1@1036.11,602.11 ; C55.1@1009.1,614.84 ccw(c1036.11,637.13) v1@1036.11,602.11 ; C55.1@1013.13,602.11 ccw(c1013.13,626.87) v1@1030.64,609.36 ; C55.1@1017.42,602.11 cw(c1017.42,583.42) v1@1030.64,596.64 ; C55.1@1017.55,597.14 ccw(c1013.1,613.77) v1@1028.79,606.7 ; C55.1@1017.64,597.16 cw(c1022.71,578.24) v1@1032.5,595.21 ; v1@1028.83,599.23 ccw(c1017.07,593.82) 1020.42,606.31 ccw(c1023.05,616.12) v1@1030.44,609.17 ; v1(1037,603) v1@1036.11,602.11
  Bottom Layer w10: R70.1@988.68,601.63 v1@1035.63,601.63 ; R70.1@1009.21,589.04 cw(c1035.63,567.63) v1@1035.63,601.63 ; R70.1@1009.21,614.22 ccw(c1035.63,635.63) v1@1035.63,601.63 ; R70.1@1011.96,601.63 ccw(c1011.96,628.04) v1@1030.64,609.36 ; R70.1@1017.01,596.64 ccw(c1012.35,614.04) v1@1028.79,606.68 ; R70.1@1018.52,597.05 cw(c1023.29,579.25) v1@1032.5,595.21 ; R70.1@1018.58,601.63 cw(c1018.58,584.58) v1@1030.64,596.64 ; v1@1028.84,599.21 ccw(c1018.48,594.41) 1021.44,605.43 ccw(c1023.46,612.99) v1@1029.76,608.34 ; v1(1037,603) v1@1035.63,601.63
NetC57_2: C57.2 IC4.8 R68.1 | length 551.1
  Top Layer w15: IC4.8@768.17,283.33 ccw(c754.09,297.41) 774,297.41 ccw(c793.91,297.41) IC4.8@779.83,283.33 ; IC4.8@774,246 774,301 801,328 841,328 v1(842,327) ; 823.89,328 cw(c823.89,308.89) v1@837.4,322.4
  Bottom Layer w15: v1@844.8,327 cw(c844.8,292.84) R68.1@868.95,317 ; v1@845.25,321.37 cw(c854.33,305.64) R68.1@859.03,323.19 ; v1@845.25,332.63 ccw(c853.1,346.22) 857.16,331.06 ccw(c861.22,315.9) v1@847.63,323.75 ; v1@846.6,322.4 cw(c857.69,311.31) 857.69,327 cw(c857.69,342.69) v1@846.6,331.6 ; R68.1@867.24,339.75 cw(c842,358.34) v1(842,327) 883.95,327 R68.1@886.32,329.37
  Bottom Layer w20: C57.2@875.72,248.56 ccw(c850.11,274.17) 886.32,274.17 ccw(c922.54,274.17) C57.2@896.93,248.56 ; R68.1@875.72,318.76 cw(c850.11,293.16) 886.32,293.16 cw(c922.54,293.15) R68.1@896.93,318.76 ; C57.2@886.32,237.95 R68.1@886.32,329.37
NetC59_1: C59.1 C60.2 D3.K U10.1 | length 5703.4
  Top Layer w50: U10.1@2728.95,682.77 ccw(c2762.29,729.71) 2803,689 ; U10.1@2735.36,677.36 ccw(c2820.71,762.71) 2820.71,642 ccw(c2820.71,521.29) 2735.36,606.64 cw(c2782.08,559.92) 2782.08,626 ; U10.1@2743.93,665.88 ccw(c2811,702.33) 2811,626 ; U10.1@2749.91,639 cw(c2803,635.82) 2803,689 ; 2825.99,689 ccw(c2825.99,797.51) 2902.72,720.78 ; 2842.87,689 cw(c2842.87,604.37) 2902.72,664.21 ; 2855.25,689 ccw(c2855.25,866) D3.K@2980.41,740.84 ; 2889.5,734 2931,692.5 ; 2895.82,676.54 cw(c2811,722.45) 2811,626 ; 2902.72,629.21 cw(c2834.43,560.93) 2931,560.93 cw(c3027.57,560.93) 2959.28,629.21 ; 2931,617.5 cw(c2931,512.47) 3005.27,586.73 ; 2931,640.17 cw(c3013.48,640.17) D3.K@2992.44,719.92 ; 2931,705.07 cw(c2996.35,705.07) D3.K@2979.68,768.26 ; 2959.62,629.55 ccw(c2991.96,597.97) 2960,566 ; 2971,657.77 cw(c3063.48,657.77) D3.K@2998.09,723.17 ; D3.K@2976.82,733.33 cw(c2927.51,738.59) 2927.51,689 ; D3.K@2980.41,723.17 cw(c2933.11,675.87) 3000,675.87 ; 2986,519 3039,466 ; 2996.81,595.19 cw(c3059.11,657.5) 2971,657.5 ; U10.1@2700,642 U10.1@2756,642 ; U10.1@2700,642 2747,689 2803,689 ; U10.1@2700,642 2716,626 2811,626 ; U10.1@2756,642 2803,689 ; U10.1@2756,642 2795,642 ; 2795,642 cw(c2795,707.24) 2741.22,670.31 ccw(c2795,707.24) 2795,642 ; 2795,642 ccw(c2795,576.76) 2741.22,613.69 cw(c2795,576.76) 2795,642 ; 2795,642 2880.5,642 2891,652.5 ; 2795,642 2811,626 ; 2803,689 2882,768 ; 2803,689 2927.5,689 ; 2811,626 2891,626 ; 2811,626 2891,546 ; 2882,768 2927,768 ; 2882,768 2882,746.5 2971,657.5 ; 2891,546 2891,626 ; 2891,546 2931,506 ; 2891,626 2891,652.5 ; 2891,652.5 2927.5,689 ; 2927,768 ccw(c2954.85,795.85) 2980.96,766.36 cw(c2955.35,795.35) 2928,768 ; 2927,768 2971,724 2971,657.5 ; 2927,768 2928,768 ; 2927.5,689 2931,692.5 ; 2928,768 2965.75,768 D3.K@2989.25,744.5 3000,733.75 D3.K@3000,696 ; 2928,768 D3.K@3000,696 ; 2931,506 2931,595 ; 2931,506 2960,477 ; 2931,595 2960,566 ; 2931,595 2931,661 ; 2931,661 3000,592 ; 2931,661 2931,692.5 ; 2932.52,768 cw(c2932.52,700.28) D3.K@2980.41,748.17 ; 2932.52,768 cw(c2932.52,700.28) D3.K@2980.41,748.17 ; 2932.52,768 cw(c2932.52,700.28) D3.K@2980.41,748.17 ; 2932.52,768 cw(c2932.52,700.28) D3.K@2980.41,748.17 ; 2932.52,768 cw(c2932.52,700.28) D3.K@2980.41,748.17 ; 2935.92,697.41 cw(c2989.25,644.08) D3.K@2989.25,719.5 ; 2935.92,697.41 cw(c2989.25,644.08) D3.K@2989.25,719.5 ; 2935.92,697.41 cw(c2989.25,644.08) D3.K@2989.25,719.5 ; 2935.92,697.41 cw(c2989.25,644.08) D3.K@2989.25,719.5 ; 2960,477 C59.1@3039,398 3039,466 ; 2960,477 2960,566 ; 2960,566 3039,487 ; 3000,592 D3.K@3000,696 ; 3000,592 3039,553 3039,487 ; 3039,466 3039,487
  Bottom Layer w50: 2618.39,625.8 cw(c2618.39,560.39) U10.1@2664.64,606.64 ; U10.1@2663.23,675.88 cw(c2549.01,781.11) C60.2@2549,625.8 2683.8,625.8 U10.1@2700,642
NetC61_1: C61.1 R74.1 | length 384.5
  Top Layer w10: C61.1@988.68,505.05 v1@1032.95,505.05 ; C61.1@1009.33,505.05 cw(c1009.33,476.33) v1@1029.64,496.64 ; C61.1@1009.85,493.28 cw(c1032.95,476.48) v1@1032.95,505.05 ; C61.1@1009.85,516.81 ccw(c1032.95,533.61) v1@1032.95,505.05 ; C61.1@1016.68,509.41 cw(c1012.45,493.61) v1@1027.64,499.67 ; C61.1@1018.09,509.03 ccw(c1022.66,526.1) v1@1031.5,510.79 ; 1019.21,505.05 ccw(c1019.21,519.79) v1@1029.64,509.36 ; v1(1036,503) 1035,503 v1@1032.95,505.05
  Bottom Layer w10: R74.1@986.68,506.63 990.31,503 v1(1036,503) cw(c1036,536.38) R74.1@1008.28,517.78 ; R74.1@999.98,512.2 ccw(c1017.24,523.79) 1017.24,503 ; R74.1@1005.82,492.49 cw(c1031.2,467.11) v1@1031.2,503 ; R74.1@1015.33,498.75 cw(c1019.93,481.58) v1@1030.6,495.8 ; 1017.59,499.35 ccw(c1013.06,516.24) v1@1028.21,507.5 ; v1@1027.54,499.92 ccw(c1016.18,495.79) 1019.31,507.47 ccw(c1022.44,519.15) v1@1030.21,509.89 ; v1@1029.64,496.64 ccw(c1014.27,481.27) 1014.27,503 ccw(c1014.27,524.73) v1@1029.64,509.36
NetC61_2: C61.2 U5.11 | length 638.9
  Top Layer w10: U5.11@585.94,752.63 585.94,698.94 579,692 579,637 594,622 783,622 888.68,516.32 C61.2@888.68,505.05 ; 838.02,566.98 cw(c776.1,505.05) C61.2@863.68,505.05 ; 855.1,549.9 cw(c810.24,505.05) C61.2@873.68,505.05 ; 872.17,532.83 cw(c844.38,505.05) C61.2@883.68,505.05
NetC65_1: C65.1 U5.15 | length 554.2
  Top Layer w10: U5.15@664.69,752.63 664.69,725 710.69,679 868.5,679 C65.1@888.68,699.18 ; U5.15@665.69,735.01 ccw(c692.26,735.01) 673.47,716.22 ; 786.68,679 ccw(c786.68,796.17) C65.1@869.54,713.32 ; 810.83,679 ccw(c810.83,772.03) C65.1@876.61,706.25 ; 834.97,679 ccw(c834.97,747.89) C65.1@883.68,699.18 ; C65.1@859.11,679 ccw(c859.11,723.74) C65.1@890.75,692.11
NetC66_1: C66.1 U5.16 | length 548.1
  Top Layer w10: U5.16@684.37,752.63 684.37,731.63 714,702 799,702 v1(816,719) ; U5.16@685.37,735.01 ccw(c695.94,735.01) 688.47,727.53 ; v1@807,719 cw(c785.27,719) 800.64,703.64 cw(c816,688.27) v1@816,710
  Bottom Layer w10: v1@820.5,711.21 cw(c831.37,692.39) 836.99,713.38 cw(c842.61,734.36) v1@823.79,723.5 ; v1@822.36,712.64 cw(c837.73,697.27) 837.73,719 cw(c837.73,740.73) v1@822.36,725.36 ; 832.93,719 cw(c832.93,671.1) C66.1@874.88,694.22 ; 849.86,719 cw(c849.86,680.43) C66.1@883.64,699.05 ; C66.1@866.12,689.39 ccw(c816,661.77) v1(816,719) 868.69,719 C66.1@888.64,699.05 ; C66.1@866.79,719 cw(c866.79,689.76) C66.1@892.4,703.87
NetC67_2: C67.2 IC4.4 R80.1 | length 653.9
  Top Layer w15: v1@514.99,398.99 ccw(c534.28,418.28) 534.28,391 ; v1@521,398.5 cw(c521,382.81) 532.1,393.9 cw(c543.19,405) v1@527.5,405 ; v1(521,405) 535,391 595,391 624,420 IC4.4@624,446 ; v1@525.6,409.6 ccw(c570.49,454.49) 570.49,391 ; 600.54,396.54 cw(c624,373.07) IC4.4@624,406.26
  Bottom Layer w15: C67.2@460.95,415.42 ccw(c431.08,445.3) 473.32,445.3 ccw(c515.57,445.3) C67.2@485.7,415.42 ; R80.1@460.95,484.26 cw(c431.07,454.38) 473.32,454.38 cw(c515.57,454.38) R80.1@485.7,484.26 ; R80.1@473.32,496.63 C67.2@473.32,403.05 v1@519.05,403.05 ; C67.2@491.02,391 cw(c519.05,364.42) v1@519.05,403.05 ; C67.2@491.02,415.09 ccw(c519.05,441.68) v1@519.05,403.05 ; C67.2@500.59,403.05 ccw(c500.59,425.41) v1@516.4,409.6 ; C67.2@502.98,398.74 ccw(c497.7,418.45) v1@515.37,408.25 ; 503.73,407.15 ccw(c507.52,421.3) v1@516.86,410.01 ; v1(521,405) v1@519.05,403.05
NetC75_1: C75.1 U5.13 | length 473.2
  Top Layer w10: v1@621.64,677.36 ccw(c612.75,686.25) 625.32,686.25 ; 625.32,699.21 ccw(c656.21,699.21) v1@634.36,677.36 ; U5.13@625.32,752.63 625.32,678.69 627,677 627,674 626,673 v1(628,671)
  Bottom Layer w10: C75.1@437,608 500,671 v1(628,671) ; C75.1@442,628 ccw(c442,664.21) 467.61,638.61 ; C75.1@452,608 cw(c488.21,608) 462.61,633.61 ; C75.1@462,608 cw(c522.36,608) 479.68,650.68 ; v1@621.64,664.64 ccw(c606.27,649.27) 606.27,671 ccw(c606.27,692.73) v1@621.64,677.36
NetC76_1: C76.1 U5.14 | length 474.1
  Top Layer w10: U5.14@645,752.63 645,702 669,678 v1(669,676) ; 652.22,694.78 cw(c633.44,676) v1@660,676 ; 657.05,689.95 ccw(c669,701.9) v1@669,685
  Bottom Layer w10: C76.1@438.36,706.95 638.05,706.95 v1(669,676) ; C76.1@457.5,692.81 cw(c491.65,658.67) 491.65,706.95 cw(c491.65,755.24) C76.1@457.5,721.09 ; v1@660,676 ccw(c638.27,676) 653.64,691.36 ccw(c669,706.73) v1@669,685
NetC78_1: C78.1 IC4.6 R99.1 R103.2 | length 808.5
  Top Layer w20: v1(580,166) 581,165 649,165 ; IC4.6@668.26,214.27 cw(c602.39,211.62) 649,165 ; IC4.6@674,246 674,190 649,165
  Bottom Layer w20: R103.2@473.32,212.37 644.63,212.37 ; R103.2@488.93,201.76 cw(c514.54,176.16) 514.54,212.37 cw(c514.54,248.58) R103.2@488.93,222.98 ; v1(580,166) 582.37,168.37 628.63,168.37 645,152 645,168.37 644.63,168.74 644.63,212.37 ; v1@582.83,163.17 cw(c595.38,150.62) 595.38,168.37 ; R99.1@630.72,157.76 ccw(c605.11,132.16) 605.11,168.37 ccw(c605.11,204.58) R99.1@630.72,178.98 ; R99.1@635.72,178.98 ccw(c614.2,200.49) 644.63,200.49 ; C78.1@636.03,247.44 cw(c614.38,225.79) 645,225.79 ; 644.63,208.67 ccw(c686.63,208.67) R99.1@656.93,178.98 ; 645,217.88 cw(c686.81,217.88) C78.1@657.25,247.44 ; C78.1@646.64,258.05 645,256.41 645,212 644.63,212.37
NetC78_2: C78.2 C82.2 IC4.7 R99.2 | length 990.2
  Top Layer w10: IC4.7@716.49,285.19 ccw(c699.12,303) 724,303 ; IC4.7@724,246 724,303 ; IC4.7@731.51,285.19 cw(c748.88,303) 724,303 ; C82.2@950.22,383.23 ccw(c916.08,349.09) 916.08,397.37 ccw(c916.08,445.65) C82.2@950.22,411.51 ; C82.2@969.36,397.37 818.37,397.37 724,303
  Top Layer w15: IC4.7@718.17,208.67 cw(c704.09,194.59) 724,194.59 cw(c743.91,194.59) IC4.7@729.83,208.67 ; IC4.7@724,246 724,172 732,164 v1(789,164) ; v1@784.4,159.4 ccw(c773.31,148.31) 773.31,164 ccw(c773.31,179.69) v1@784.4,168.6
  Bottom Layer w15: R99.2@746.32,168.37 750.69,164 v1(789,164) cw(c789,189.89) R99.2@766.52,177.05 ; R99.2@763.7,156 cw(c783.02,136.67) v1@783.02,164 ; R99.2@771.95,161.03 cw(c776.09,145.59) v1@785.27,158.68 ; v1@784.4,159.4 ccw(c773.31,148.31) 773.31,164 ccw(c773.31,179.69) v1@784.4,168.6
  Bottom Layer w20: R99.2@735.72,178.98 ccw(c709.35,205.34) 746.64,205.34 ; C78.2@736.03,247.44 cw(c710.43,221.83) 746.64,221.83 cw(c782.85,221.83) C78.2@757.25,247.44 ; R99.2@746.64,168.68 C78.2@746.64,258.05 ; 746.64,203.82 ccw(c781.78,203.82) R99.2@756.93,178.98
NetC80_1: C80.1 R103.1 T6.2 | length 3670.9
  Top Layer w15: v6@233.5,1214 cw(c191.25,1214) 221.13,1184.13 cw(c251,1154.25) v6@251,1196.5 ; v1@240.4,407.6 ccw(c229.31,418.69) 245,418.69 ccw(c260.69,418.69) v1@249.6,407.6 ; v1(245,403) 245,494 171,568 171,1134 v6(251,1214) ; v1@376.4,1799.6 ccw(c365.31,1810.69) 381,1810.69 ccw(c396.69,1810.69) v1@385.6,1799.6 ; v1(381,1795) 381,1960 460,2039 460,2212 575,2327 575,2756.38 T6.2@642.62,2824 ; T6.2@610.75,2824 cw(c533.81,2824) 588.22,2769.59 cw(c642.62,2715.19) T6.2@642.62,2792.13 ; T6.2@625.75,2824 cw(c585.02,2824) 613.82,2795.2 cw(c642.62,2766.4) T6.2@642.62,2807.13
  Bottom Layer w15: v1@240.4,398.4 cw(c229.31,387.31) 245,387.31 cw(c260.69,387.31) v1@249.6,398.4 ; v1(245,403) 245,338.69 R103.1@373.32,210.37 ; v6(251,1214) 388,1351 388,1788 v1(381,1795) ; v6@251,1231.5 ccw(c251,1273.75) 280.87,1243.87 ccw(c310.75,1214) v6@268.5,1214 ; 336.33,247.37 cw(c301.33,212.37) R103.1@350.82,212.37 ; 343.57,240.12 ccw(c368.32,264.88) R103.1@368.32,229.87 ; v1@376.4,1790.4 cw(c348.41,1762.41) 388,1762.41
  Bottom Layer w20: C80.1@590.36,2729.95 616.95,2729.95 642.62,2755.62 ; C80.1@599.45,2744.38 ccw(c611.46,2786.78) 642.62,2755.62 ; T6.2@622.4,2802.7 cw(c577.72,2755.63) 642.62,2755.63 ; T6.2@642.62,2824 642.62,2755.62 ; T6.2@662.84,2802.7 ccw(c707.52,2755.63) 642.62,2755.63
NetC81_2: C81.2 U5.10 | length 358.4
  Top Layer w10: C81.2@366,618 477,618 566.26,707.26 U5.10@566.26,752.63 ; C81.2@385.14,603.86 cw(c419.28,569.72) 419.28,618 cw(c419.28,666.28) C81.2@385.14,632.14
NetC82_1: C82.1 R50.2 Re1.5 | length 625.4
  Top Layer w10: C82.1@1069.36,397.37 R50.2@1177.68,397.37 1186.79,406.48 Re1.5@1186.79,505.02 ; C82.1@1088.5,383.23 cw(c1122.65,349.09) 1122.65,397.37 cw(c1122.65,445.65) C82.1@1088.5,411.51 ; R50.2@1158.53,383.23 ccw(c1124.39,349.09) 1124.39,397.37 ccw(c1124.39,445.65) R50.2@1158.53,411.51 ; R50.2@1168.53,411.51 ccw(c1124.47,455.58) 1186.79,455.58 ; Re1.5@1169.44,487.67 cw(c1127.57,445.8) 1186.79,445.8 cw(c1246,445.8) Re1.5@1204.13,487.67 ; R50.2@1175.61,404.44 ccw(c1148.61,431.44) 1186.79,431.44 ; Re1.5@1176.51,494.74 cw(c1151.71,469.94) 1186.79,469.94 cw(c1221.86,469.94) Re1.5@1197.06,494.74 ; 1186.79,435.73 ccw(c1221.04,435.73) R50.2@1196.82,411.51
NetC83_1: C83.1 R75.2 | length 575
  Bottom Layer w10: R75.2@986.32,415.37 1077.37,415.37 1107.64,445.64 C83.1@1107.64,735.05 ; R75.2@1005.47,401.23 cw(c1039.61,367.09) 1039.61,415.37 cw(c1039.61,463.65) R75.2@1005.47,429.51 ; C83.1@1093.5,720.91 cw(c1059.35,686.76) 1107.64,686.76 cw(c1155.92,686.76) C83.1@1121.78,720.91
NetC83_2: C83.2 R67.1 Re1.6 | length 853.2
  Bottom Layer w10: C83.2@1193.5,749.19 ccw(c1159.35,783.33) 1207.64,783.33 ccw(c1255.92,783.33) C83.2@1221.78,749.19 ; R67.1@1193.53,820.49 cw(c1159.48,786.44) 1207.64,786.44 ; C83.2@1198.5,720.91 cw(c1122.44,644.85) 1230,644.85 ; C83.2@1205.57,727.98 cw(c1146.58,668.99) 1230,668.99 ; 1207.64,786.26 cw(c1256.05,786.26) R67.1@1221.82,820.49 ; R67.1@1207.68,834.63 1207.64,834.59 C83.2@1207.64,735.05 1230,712.69 1230,548.42 Re1.6@1273.4,505.02 ; C83.2@1212.64,735.05 cw(c1170.72,693.13) 1230,693.13 ; Re1.6@1248.87,505.02 ccw(c1189.66,505.02) 1231.53,546.89 ccw(c1273.4,588.76) Re1.6@1273.4,529.54 ; Re1.6@1258.87,505.02 ccw(c1223.8,505.02) 1248.6,529.82 ccw(c1273.4,554.62) Re1.6@1273.4,519.54
NetD1_A: D1.A O4.2 | length 483.3
  Bottom Layer w15: O4.2@1612.5,3181 cw(c1630.61,3181) 1617.8,3193.8 ; O4.2@1623,3161 1623,3199 1661,3237 1661,3311.26 ; O4.2@1627.5,3181 cw(c1681.82,3181) 1643.41,3219.41 ; 1685.81,3336.07 ccw(c1641.87,3380.01) D1.A@1704,3381.41 ; D1.A@1689,3381.08 cw(c1593.35,3378.92) 1661,3311.26 ; 1689.12,3339.38 cw(c1719,3309.5) D1.A@1719,3351.75 ; D1.A@1731.5,3381.75 1661,3311.26
NetD2_A: D2.A O5.2 | length 712.9
  Bottom Layer w20: O5.2@1101,3162 1101,3130 1117,3114 1401,3114 1417,3130 1417,3274 1493,3350 1521,3350 1547.75,3376.75 D2.A@1555.5,3376.75 ; O5.2@1103,3142 ccw(c1136.8,3142) 1112.9,3118.1
NetD4_A: D4.A Q1.3 Re1.8 | length 598.5
  Top Layer w20: Re1.8@1486,485.49 cw(c1486,438.34) 1519.34,471.68 cw(c1552.67,505.02) Re1.8@1505.53,505.02 ; Re1.8@1486,505.02 1526.26,464.75 D4.A@1637.5,464.75 1692.29,409.96 ; D4.A@1605.56,445.31 ccw(c1558.61,398.36) 1558.61,464.75 ccw(c1558.61,531.14) D4.A@1605.56,484.2 ; D4.A@1650,437.25 cw(c1650,401.04) 1675.61,426.65 ; D4.A@1677.02,459.6 ccw(c1731.53,449.21) 1692.29,409.97 ; Q1.3@1692.29,318 1692.29,409.96
NetD7_A: D7.A JP1.2 | length 863.8
  Bottom Layer w15: JP1.2@993,2617 1045,2669 ; JP1.2@993,2639.5 ccw(c993,2693.82) 1031.41,2655.41 ccw(c1069.82,2617) JP1.2@1015.5,2617 ; 1076.41,2669 ccw(c1076.41,2801.32) D7.A@1179.34,2718.17 ; 1107.81,2669 ccw(c1107.81,2775.95) D7.A@1191,2708.74 ; 1139.21,2669 ccw(c1139.21,2750.58) D7.A@1202.67,2699.31 ; D7.A@1166.05,2692.09 cw(c1150.83,2681.94) 1163.76,2669 ; D7.A@1167.67,2727.59 cw(c1045.01,2826.69) 1045.01,2669 ; 1170.61,2669 ccw(c1170.61,2725.21) D7.A@1214.34,2689.89 ; D7.A@1189.35,2678.79 ccw(c1187.51,2645.26) 1163.77,2669 ; D7.A@1203.5,2708.74 1163.76,2669 ; 1045,2669 1163.76,2669
NetD7_K: D7.K U2.8 | length 833.9
  Bottom Layer w10: D7.K@1203.5,2551.26 1286.76,2468 1575,2468 1614,2507 U2.8@1709,2507 ; D7.K@1216,2518.76 cw(c1216,2470.48) 1250.15,2504.62 ; D7.K@1228.5,2551.26 ccw(c1288.86,2551.26) 1246.18,2508.58 ; D7.K@1238.5,2551.26 ccw(c1323,2551.26) 1263.25,2491.51 ; D7.K@1248.5,2551.26 ccw(c1357.14,2551.26) 1280.32,2474.44 ; U2.8@1669.9,2499.4 ccw(c1651.56,2481.05) 1651.56,2507 ccw(c1651.56,2532.95) U2.8@1669.9,2514.6
NetD14_A: D14.A O6.2 | length 254.3
  Top Layer w25: D14.A@2790.5,3012.75 2860,2943.26 O6.2@2860,2882 ; D14.A@2803,2987.75 cw(c2803,2957.57) D14.A@2824.34,2978.91 ; D14.A@2828,3012.75 ccw(c2918.54,3012.75) 2854.52,2948.74